# EAGLE board Yellow (EAGLE 9.0.1)
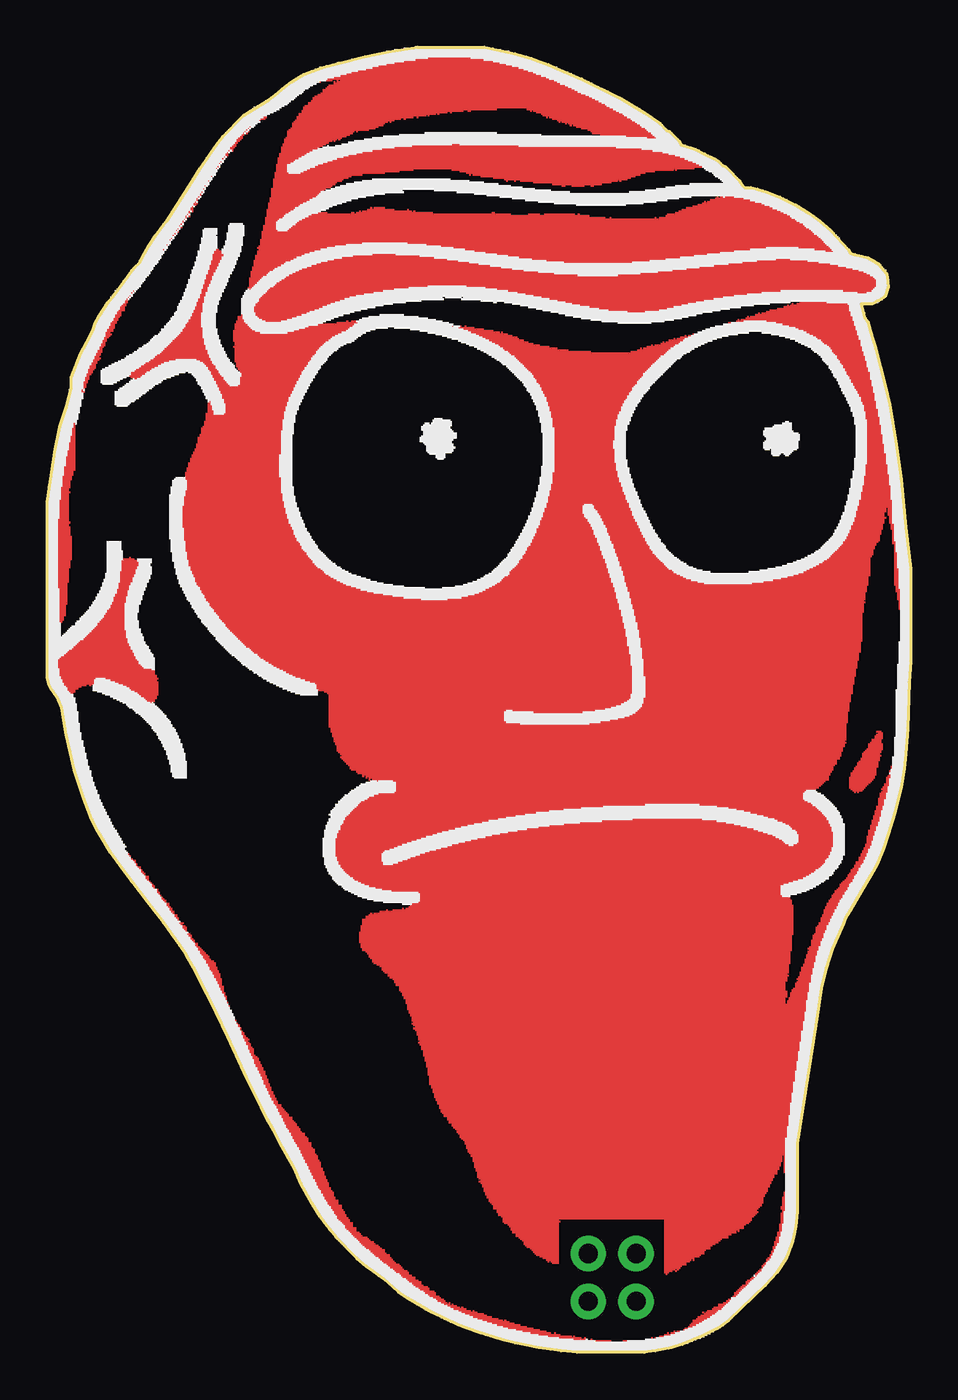
[diagram p0: board, top side]
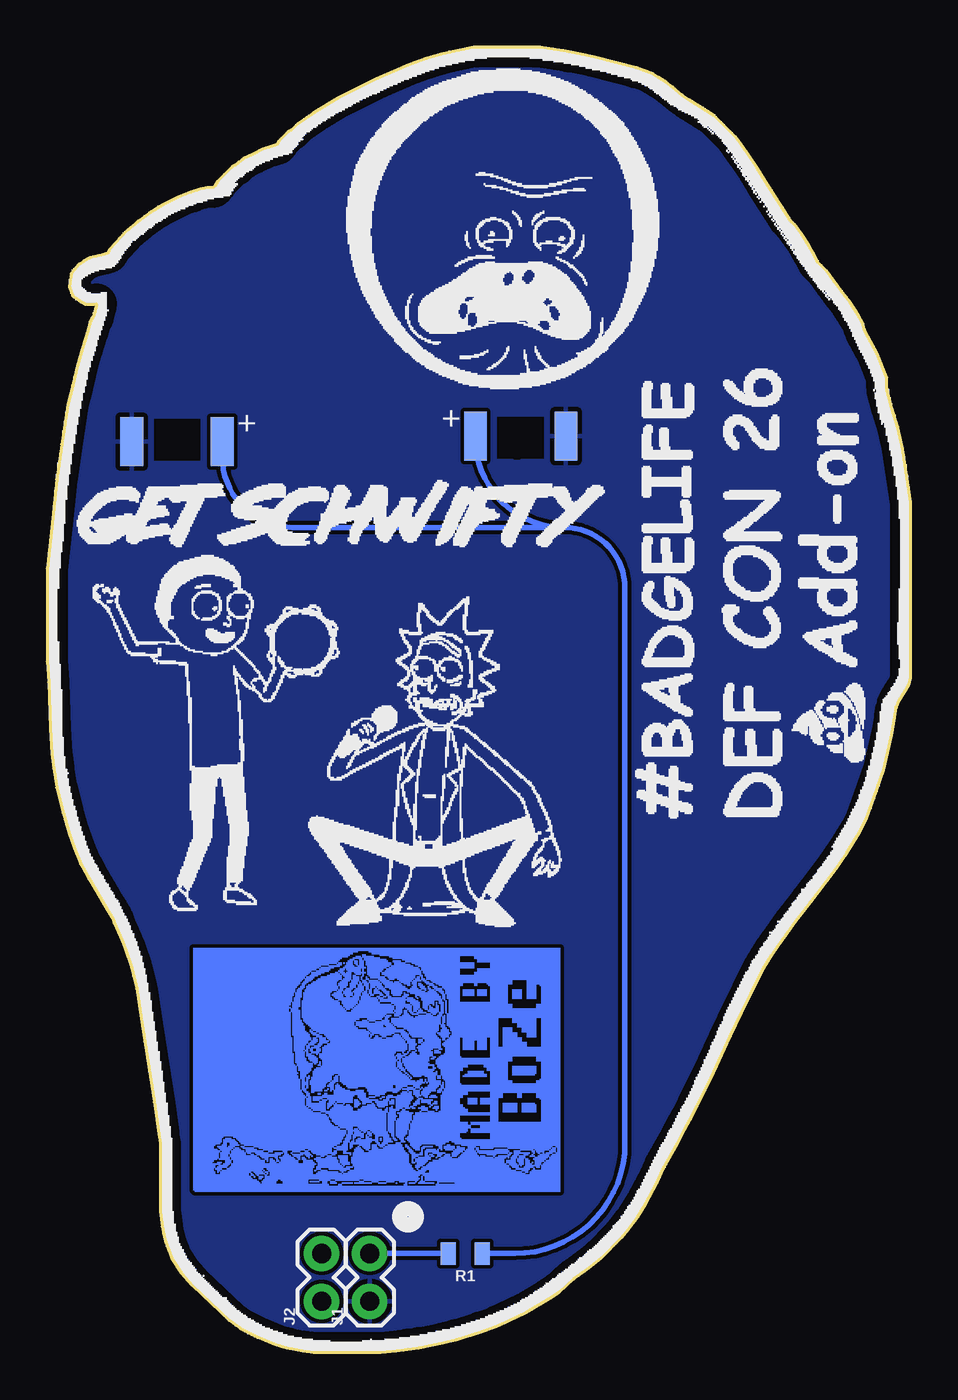
[diagram p1: board, bottom side, seen from below]

Size 45.8 x 69.25 mm. Coordinates in mm from the lower left corner, seen from the top.
Outline: 0,35.81 0,45.12 0.42,47.92 0.68,49.1 1.02,50.12 1.27,51.13 1.27,51.73 1.78,53 2.29,53.93 2.46,54.27 2.54,54.61 2.79,55.03 3.22,55.71 3.56,56.13 4.06,56.81 4.49,57.4 4.66,57.57 4.91,57.82 5.16,58.33 5.42,58.75 5.76,59.26 6.18,59.85 6.35,60.02 7.7,62.14 8.13,62.82 8.64,63.58 9.06,64.17 9.31,64.51 10.41,65.61 11.77,66.46 12.11,66.71 12.61,67.13 12.95,67.39 13.38,67.64 13.63,67.81 14.56,68.15 15.49,68.4 16.85,68.74 18.12,69 19.64,69.25 23.2,69.25 24.8,68.91 25.65,68.66 26.58,68.32 28.36,67.56 30.39,66.54 31.66,65.78 32.51,65.19 32.85,64.85 33.02,64.76 33.52,64.26 33.61,64.09 33.86,64 34.37,63.83 34.88,63.58 35.39,63.32 35.64,63.16 35.81,62.99 35.98,62.9 36.74,62.14 36.91,61.89 37,61.8 37.33,61.8 37.67,61.72 38.18,61.55 38.86,61.29 39.7,60.87 40.38,60.45 40.97,60.02 41.57,59.52 42.5,58.5 42.58,58.33 42.84,58.25 43.51,58.08 43.85,57.91 44.11,57.74 44.53,57.23 44.61,56.55 44.45,56.04 44.11,55.79 43.77,55.62 43.18,55.62 43.35,54.94 43.51,54.69 43.68,54.1 43.94,53.25 44.19,52.32 44.45,51.3 44.7,50.29 45.04,48.17 45.29,46.31 45.55,43.77 45.8,41.57 45.8,36.66 45.72,35.56 45.63,33.1 45.55,31.75 45.46,30.99 45.29,29.97 44.95,28.61 44.61,27.51 44.36,26.75 44.02,25.91 43.68,25.31 43.18,24.47 42.58,23.45 42.33,23.03 42.24,22.77 41.82,21.84 41.65,21.42 41.31,20.4 41.06,19.3 40.81,17.69 40.64,16.51 40.13,13.29 39.87,11.6 39.79,11.09 39.79,7.45 39.7,6.69 39.62,6.27 39.54,5.93 39.2,5 38.69,4.23 38.1,3.56 36.15,1.69 35.56,1.27 34.71,0.85 33.69,0.42 33.1,0.25 32.25,0.09 31.66,0 28.11,0 27.26,0.09 26.67,0.17 26.07,0.25 24.8,0.51 24.13,0.68 22.77,1.1 21.84,1.44 20.4,2.12 19.13,2.88 18.62,3.22 17.86,3.89 17.27,4.32 16.93,4.57 16.42,5 15.32,6.1 14.98,6.52 14.73,6.86 14.48,7.2 14.05,7.87 13.46,8.97 13.12,9.74 12.36,11.09 12.02,11.77 11.68,12.36 11.34,13.04 10.92,13.88 10.58,14.56 10.16,15.49 9.57,16.76 8.97,18.03 8.47,19.05 7.79,20.4 7.37,21.08 7.03,21.59 6.6,22.18 6.18,22.77 5.33,23.87 4.49,24.97 3.98,25.65 3.39,26.5 2.71,27.6 2.37,28.28 1.95,29.38 1.44,30.9 1.02,32.76 0.85,33.69 0.76,34.2 0.59,34.63 0.25,35.13 0.08,35.47 0,35.81
Copper layers (1*16): Top 0.035mm / dielectric 1.5mm / Bottom 0.035mm
Design rules "default *": minimum track width 6mil, minimum drill 0.35mm, track to track 8mil, track to pad 6mil, pad to pad 6mil, via to via 6mil, smd to smd 6mil, copper to edge 40mil, drill to drill 6mil, minimum pad ring 10mil, minimum via ring 8mil, stop-mask expansion 4mil, vias tented up to drill 0mil, thermal gap 10mil
bRestrict: area 20.7,47.4 to 21,47.5; area 20.6,47.5 to 21.1,47.5; area 20.6,47.5 to 21.1,47.6; area 38.5,47.5 to 38.8,47.6; area 39.2,47.5 to 39.3,47.6; area 20.3,47.6 to 21.1,47.7; area 38.4,47.6 to 38.9,47.7; area 39.1,47.6 to 39.4,47.7; area 20.2,47.7 to 21.5,47.8; area 38.4,47.7 to 39.5,47.8; area 20.1,47.8 to 21.5,47.9; area 38.4,47.8 to 39.6,47.9; area 20.1,47.9 to 21.5,48; area 38.1,47.9 to 38.3,48; area 38.4,47.9 to 39.8,48; area 20.1,48 to 21.6,48; area 38,48 to 39.8,48; area 20.1,48 to 21.5,48.1; area 38,48 to 39.8,48.1; area 20,48.1 to 21.5,48.2; area 38,48.1 to 39.8,48.2; area 19.9,48.2 to 21.5,48.3; area 38,48.2 to 39.8,48.3; area 19.8,48.3 to 21.5,48.4; area 38.1,48.3 to 39.8,48.4; area 19.8,48.4 to 21.5,48.5; area 38.1,48.4 to 39.9,48.5; area 19.8,48.5 to 21.7,48.6; area 38.1,48.5 to 39.9,48.6; area 19.9,48.6 to 21.7,48.6; area 38.1,48.6 to 39.9,48.6; area 19.9,48.6 to 21.7,48.7; area 38,48.6 to 39.9,48.7; area 19.9,48.7 to 21.7,48.8; area 38,48.7 to 39.8,48.8; area 19.9,48.8 to 21.5,48.9; area 38,48.8 to 39.6,48.9; area 19.9,48.9 to 21.5,49; area 38.1,48.9 to 39.5,49; area 19.9,49 to 21.4,49.1; area 38.1,49 to 39.5,49.1; area 19.9,49.1 to 21.4,49.1; area 38.5,49.1 to 39.5,49.1; area 19.9,49.1 to 21.5,49.2; area 38.6,49.1 to 39.5,49.2; area 20,49.2 to 20.3,49.3; area 20.4,49.2 to 21.5,49.3; area 39,49.2 to 39.5,49.3; area 20.4,49.3 to 21.5,49.4; area 39.2,49.3 to 39.3,49.4; area 20.4,49.4 to 21.4,49.5; area 20.5,49.5 to 21,49.6; area 19.5,47.4 to 21.9,49.6; area 37.7,47.3 to 40.1,49.5

## Footprints (pad centres in the part's own frame; a part is rotated, then mirrored left to right if it is on the bottom)
1X02 = drill 1.016 pad 1.88: 1 0,0; 2 2.54,0
REV_LED = smd 1.2 x 2.6: P$1 1.8,1.8; P$2 6.6,1.8
0805 = smd 0.8 x 1.2: 1 -0.9,0; 2 0.9,0

## Placement (x,y rotation side)
J1  [1X02]  28.7,2.71 90 bottom
J2  [1X02]  31.24,2.71 90 bottom
LED1  REVERSE_LED  [REV_LED]  34.71,50.12 180 bottom
LED2  REVERSE_LED  [REV_LED]  24.89,46.82 0 bottom
R1  [0805]  23.62,5.25 180 bottom

## Library data of the parts
J1 J2 = SparkFun-Connectors
LED1 LED2 = Bliss; SPICEPREFIX: L
R1 = SparkFun-Resistors; PROD_ID: RES-08474

## Nets
GND: J1.1 LED1.P$2 LED2.P$2
N$1: LED1.P$1 LED2.P$1 R1.1
VCC: J1.2 R1.2

## Tracks (layer width: path | path; a pad name or v marks a point on that pad's centre or on a via)
GND
  pour Bottom: 0,45.12 0.42,47.92 0.68,49.1 1.02,50.12 1.27,51.13 1.27,51.73 1.78,53 2.46,54.27 2.54,54.6 3.22,55.71 4.49,57.4 4.91,57.82 5.16,58.33 5.42,58.75 6.18,59.85 6.35,60.02 8.13,62.82 9.23,64.42 10.33,65.53 11.77,66.46 12.95,67.39 13.63,67.81 14.56,68.15 15.83,68.49 16.85,68.74 19.56,69.25 23.2,69.25 24.8,68.91 25.65,68.66 28.19,67.64 30.22,66.63 30.98,66.2 31.41,65.95 32.42,65.27 32.85,64.85 33.02,64.76 33.52,64.26 33.61,64.09 34.37,63.83 35.05,63.49 35.39,63.32 35.64,63.16 35.81,62.99 35.98,62.9 36.66,62.22 37,61.8 37.33,61.8 38.43,61.46 38.86,61.29 39.54,60.95 40.38,60.45 40.97,60.02 41.48,59.6 42.5,58.5 42.58,58.33 43.51,58.08 43.85,57.91 44.11,57.74 44.53,57.23 44.61,56.55 44.45,56.04 44.11,55.79 43.77,55.62 43.18,55.62 43.34,54.94 43.51,54.69 43.68,54.1 44.19,52.32 44.7,50.29 45.04,48.17 45.29,46.39 45.55,43.85 45.8,41.57 45.8,36.66 45.72,35.56 45.63,33.02 45.55,31.83 45.38,30.39 45.04,28.95 44.78,28.11 44.45,27.01 44.02,25.91 42.33,23.03 42.24,22.77 41.74,21.67 41.31,20.4 41.06,19.3 39.79,11.09 39.79,7.53 39.7,6.6 39.54,5.93 39.2,4.99 38.69,4.23 38.1,3.56 37.67,3.13 36.15,1.69 35.56,1.27 33.69,0.42 33.1,0.25 31.75,0 28.11,0 27.26,0.08 26.07,0.25 24.8,0.51 24.13,0.68 23.03,1.02 22.27,1.27 21.67,1.52 20.57,2.03 20.23,2.2 19.3,2.79 18.62,3.22 17.86,3.89 16.93,4.57 16.42,4.99 15.41,6.01 14.98,6.52 14.22,7.62 13.46,8.97 13.12,9.74 12.44,11.01 11.85,11.94 11.09,13.55 10.07,15.75 9.4,17.19 8.13,19.73 7.79,20.4 7.28,21.25 6.43,22.43 5.42,23.79 4.06,25.57 2.96,27.18 2.29,28.53 1.95,29.38 1.44,30.82 1.1,32.51 0.93,33.19 0.76,34.2 0.59,34.63 0.34,35.05 0.08,35.47 0,35.73
N$1
  Bottom 0.305: R1.1 21,5.25 arc-90 15.15,11.09 15.15,40.55 arc-90 18.37,43.77 | 18.37,43.77 32.76,43.77 arc90 36.51,47.52 LED1.P$1 | 18.37,43.77 arc90 23.09,48.49 LED2.P$1
VCC
  Bottom 0.152: R1.2
  Bottom 0.305: J1.2 R1.2
(copper drawn outside any net)
  shapes: Bottom area x1803, Top area x3075

## Text on the board
bPlace: + | +